# Altium PCB PCB1.PcbDoc (part 2 of 4)
Units mm, origin at the board's own origin, x right, y up, seen from the top; angles counter-clockwise.
Board outline 27.87 x 27.34 mm, 4 copper layers (Top Layer, Mid-Layer 1, Mid-Layer 2, Bottom Layer); 8 components, 11 nets, 32 pads, 618 vias.
Unrouted connection lines stored in the file: 1.
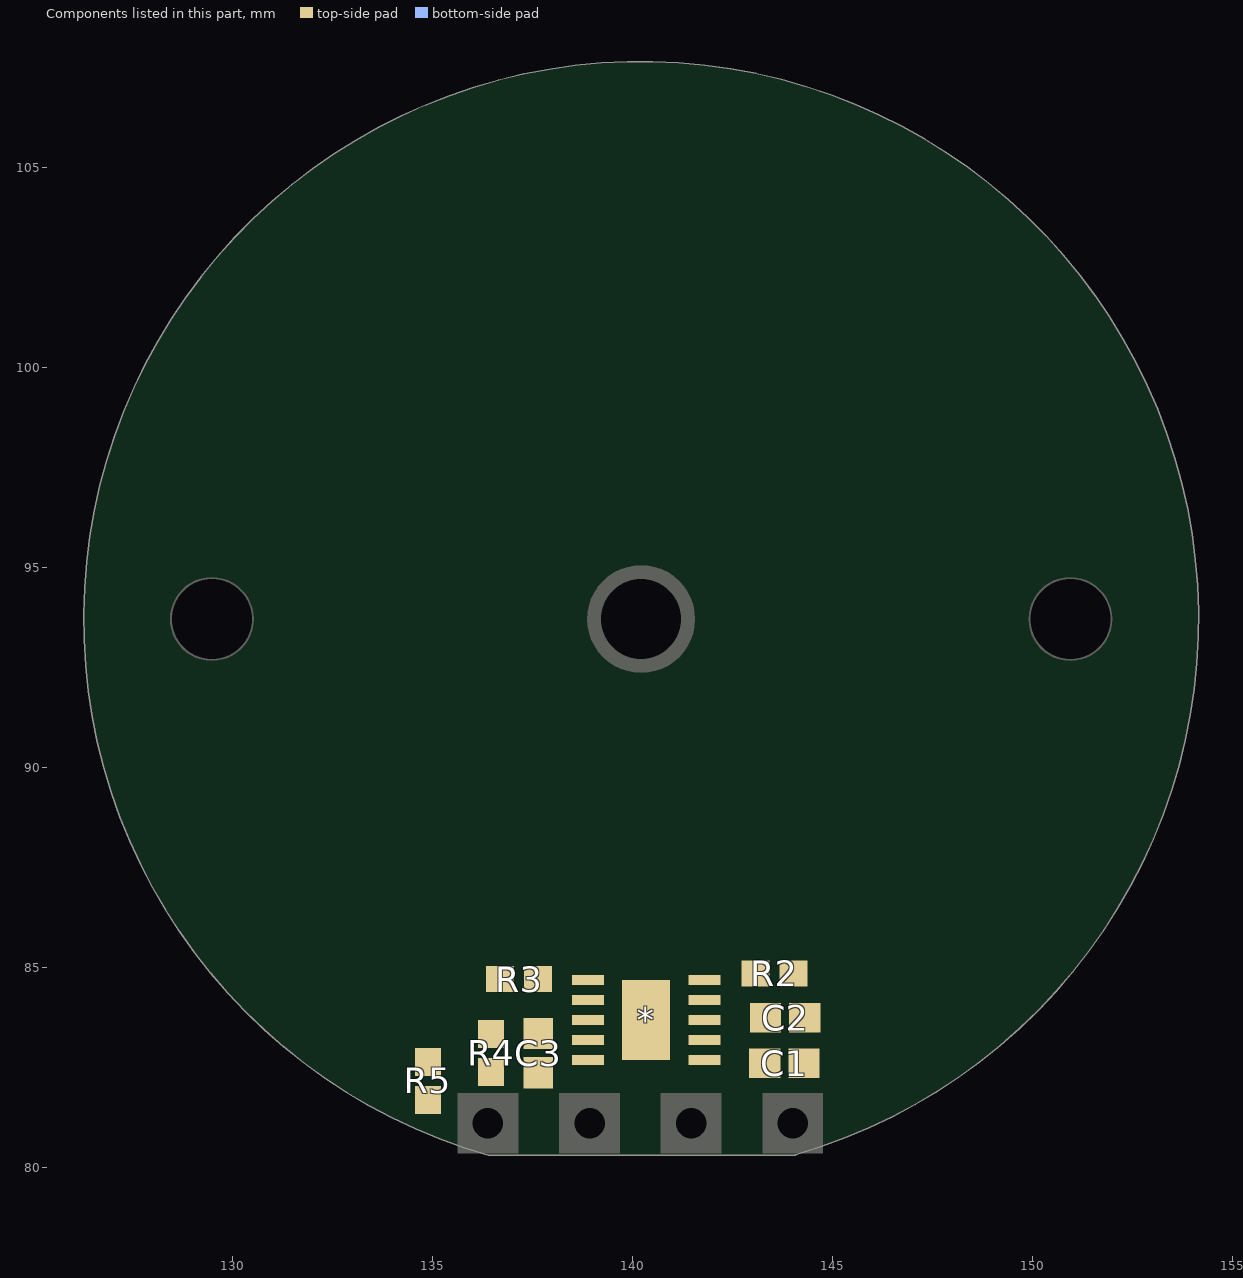
[diagram p4: the components of this part, seen from the top]

## Via types
v1: diameter 0.35, hole 0.3, Top Layer to Bottom Layer, 585 vias
v2: diameter 0.4, hole 0.2, Top Layer to Bottom Layer, tented both sides, 24 vias
v3: diameter 0.6, hole 0.3, Top Layer to Bottom Layer, tented both sides, 9 vias

## Nets (pads, with @x,y where several pads share a name; then routed paths per layer and width w, separated by ;. In a path a pad name is that pad's centre, name@x,y a point inside that pad or via, vN(x,y) a via of type N, cw(c..) or ccw(c..) an arc to the next point about the centre after c; other vN are vias at no path point) (continued)
copper on no net: | length 2486
  Top Layer w0.1: 135.233,91.614 cw(c135.369,91.668) 135.369,91.814 136.645,91.814 cw(c136.645,91.741) 136.709,91.777 ; 135.238,91.601 v2(135.769,91.18) ; 135.733,97.079 134.882,96.012 ccw(c135.369,95.76) 135.412,95.214 136.645,95.214 ccw(c136.645,95.687) 137.05,95.442 ; 135.733,97.079 cw(c136.017,96.882) 136.316,97.055 136.954,95.949 cw(c136.718,95.813) 136.959,95.685 ; v2(136.311,95.964) 136.439,96.442 136.143,96.955 ccw(c136.017,96.882) 135.902,96.972 135.894,96.961 135.056,95.907 ccw(c135.369,95.76) 135.369,95.414 136.645,95.414 ccw(c136.645,95.687) 136.877,95.543 ; 136.712,91.77 ccw(c136.645,91.741) 136.709,91.776 ; 136.776,91.659 cw(c136.718,91.615) 136.781,91.652 ; 136.89,91.861 ccw(c136.645,91.741) 136.877,91.885 ; 136.89,95.567 cw(c136.645,95.687) 136.877,95.543 ; 136.944,91.768 cw(c136.718,91.615) 136.959,91.744 ; 136.944,95.661 ccw(c136.718,95.813) 136.959,95.685 ; 137.067,91.954 ccw(c136.645,91.741) 137.05,91.986 ; 137.067,95.474 cw(c136.645,95.687) 137.05,95.442 ; 137.114,91.874 cw(c136.718,91.615) 137.132,91.843 ; 137.114,95.554 ccw(c136.718,95.813) 137.132,95.585 ; 137.244,92.049 ccw(c136.645,91.741) 137.224,92.085 ; 137.244,95.379 cw(c136.645,95.687) 137.224,95.343 ; 137.284,91.98 cw(c136.718,91.615) 137.305,91.944 ; 137.284,95.449 ccw(c136.718,95.813) 137.305,95.484 ; 137.398,92.184 ccw(c140.208,93.714) 137.437,92.114 ccw(c140.208,93.714) 137.478,92.045 ; 137.398,95.244 cw(c140.208,93.714) 137.437,95.314 cw(c140.208,93.714) 137.478,95.383 ; 137.42,92.144 ccw(c136.645,91.741) 136.645,92.614 135.362,92.614 ccw(c135.369,91.668) 134.523,91.245 135.394,90.135 ccw(c136.017,90.546) 136.663,90.173 137.301,91.279 ccw(c136.718,91.615) 137.305,91.944 ; 137.42,95.284 cw(c136.645,95.687) 136.645,94.814 135.362,94.814 cw(c135.369,95.76) 134.523,96.183 135.394,97.293 cw(c136.017,96.882) 136.663,97.255 137.301,96.149 cw(c136.718,95.813) 137.305,95.484 ; 137.454,92.084 cw(c136.718,91.615) 137.474,91.179 136.832,90.067 cw(c136.017,90.546) 135.227,90.025 134.344,91.155 cw(c135.369,91.668) 135.369,92.814 136.645,92.814 cw(c136.645,91.741) 137.572,92.282 ; 137.454,95.344 ccw(c136.718,95.813) 137.474,96.249 136.832,97.361 ccw(c136.017,96.882) 135.227,97.403 134.344,96.273 ccw(c135.369,95.76) 135.369,94.614 136.645,94.614 ccw(c136.645,95.687) 137.572,95.146 ; 137.488,87.945 cw(c139.56,88.5) 137.702,89.573 138.122,90.301 138.359,90.711 ccw(c136.718,91.615) 138.303,92.614 ; 137.492,87.929 137.549,87.693 cw(c136.483,87.262) 137.633,87.231 ; 138.343,92.547 cw(c140.208,93.714) 138.303,92.614 ; 138.762,94.549 138.303,94.814 cw(c136.645,95.687) 136.683,93.814 135.369,93.814 cw(c135.369,95.76) 133.58,96.525 134.618,97.927 cw(c136.017,96.882) 137.529,97.755 138.188,96.612 cw(c136.718,95.813) 138.13,94.914 cw(c136.645,95.687) 136.688,94.014 135.369,94.014 cw(c135.369,95.76) 133.765,96.449 134.765,97.789 cw(c136.017,96.882) 137.355,97.655 138.017,96.508 cw(c136.718,95.813) 138.004,95.094 ; 139.54,88.356 cw(c139.56,88.5) 139.434,88.573 140.072,89.679 cw(c140.135,89.642) 140.136,89.715 ; 139.546,88.355 139.584,88.355 v2(140.183,88.603) ; 140.128,90.515 ccw(c140.208,93.714) 140.208,90.514 ccw(c140.208,93.714) 140.288,90.515 ; 140.128,96.913 cw(c140.208,93.714) 140.208,96.914 cw(c140.208,93.714) 140.288,96.913 ; 140.144,89.715 ccw(c140.135,89.642) 140.137,89.715 140.208,89.714 140.279,89.715 ccw(c140.281,89.642) 140.272,89.715 ; 140.154,89.914 ccw(c140.135,89.642) 140.126,89.915 ; 140.154,97.514 cw(c140.135,97.786) 140.126,97.513 ; 140.162,90.114 ccw(c140.135,89.642) 140.126,90.115 ; 140.162,97.314 cw(c140.135,97.786) 140.126,97.313 ; 140.168,90.314 ccw(c140.135,89.642) 140.126,90.315 ; 140.168,97.114 cw(c140.135,97.786) 140.126,97.113 ; 140.174,90.514 ccw(c140.135,89.642) 139.379,90.079 138.738,88.967 ccw(c139.56,88.5) 139.504,87.556 140.9,87.756 ccw(c140.856,88.5) 141.502,88.873 140.864,89.979 ccw(c140.281,89.642) 140.29,90.315 ; 140.174,96.914 cw(c140.135,97.786) 139.379,97.349 138.738,98.461 cw(c139.56,98.928) 139.504,99.872 140.9,99.672 cw(c140.856,98.928) 141.502,98.555 140.864,97.449 cw(c140.281,97.786) 140.29,97.113 ; 140.208,95.384 140.208,95.914 cw(c140.135,97.786) 138.532,96.817 138.295,97.227 137.875,97.955 cw(c139.56,98.928) 139.328,100.86 141.061,100.662 cw(c140.856,98.928) 142.368,98.055 141.708,96.912 cw(c140.281,97.786) 140.208,96.114 cw(c140.135,97.786) 138.708,96.912 138.048,98.055 cw(c139.56,98.928) 139.355,100.662 141.015,100.466 cw(c140.856,98.928) 142.194,98.155 141.533,97.008 cw(c140.281,97.786) 140.301,96.312 ; v2(140.208,98.214) 140.686,98.342 140.982,98.855 ccw(c140.856,98.928) 140.876,99.072 140.863,99.074 139.531,99.273 ccw(c139.56,98.928) 139.261,98.755 139.899,97.649 ccw(c140.135,97.786) 140.126,97.513 ; 140.242,90.514 cw(c140.281,89.642) 141.037,90.079 141.678,88.967 cw(c140.856,88.5) 140.912,87.556 139.493,87.356 cw(c139.56,88.5) 138.568,89.073 139.206,90.179 cw(c140.135,89.642) 140.13,90.715 ; 140.242,96.914 ccw(c140.281,97.786) 141.037,97.349 141.678,98.461 ccw(c140.856,98.928) 140.912,99.872 139.493,100.072 ccw(c139.56,98.928) 138.568,98.355 139.206,97.249 ccw(c140.135,97.786) 140.13,96.713 ; 140.248,90.314 cw(c140.281,89.642) 140.29,90.315 ; 140.248,97.114 ccw(c140.281,97.786) 140.29,97.113 ; 140.254,90.114 cw(c140.281,89.642) 140.29,90.115 ; 140.254,97.314 ccw(c140.281,97.786) 140.29,97.313 ; 140.262,89.914 cw(c140.281,89.642) 140.29,89.915 ; 140.262,97.514 ccw(c140.281,97.786) 140.29,97.513 ; 140.28,89.715 cw(c140.281,89.642) 140.344,89.679 140.982,88.573 cw(c140.856,88.5) 140.876,88.356 140.863,88.354 139.531,88.156 cw(c139.56,88.5) 139.261,88.673 139.899,89.779 cw(c140.135,89.642) 140.126,89.915 ; 140.287,91.515 cw(c140.208,93.714) 140.208,91.514 ; 141.654,94.549 142.113,94.814 cw(c143.698,95.813) 142.057,96.717 142.294,97.127 142.714,97.855 cw(c144.399,96.882) 145.957,98.049 146.651,96.449 cw(c145.047,95.76) 145.047,94.014 143.728,94.014 cw(c143.771,95.687) 142.286,94.914 cw(c143.698,95.813) 142.228,96.612 142.887,97.755 cw(c144.399,96.882) 145.798,97.927 146.458,96.391 cw(c145.047,95.76) 145.047,94.214 143.723,94.214 cw(c143.771,95.687) 142.505,94.933 ; 142.151,92.683 cw(c140.208,93.714) 142.113,92.614 ; 142.788,87.159 cw(c143.933,87.262) 144.019,88.409 144.389,88.4 ccw(c144.399,90.546) 146.131,89.279 ; 142.938,92.045 ccw(c140.208,93.714) 142.979,92.114 ccw(c140.208,93.714) 143.018,92.184 ; 142.938,95.383 cw(c140.208,93.714) 142.979,95.314 cw(c140.208,93.714) 143.018,95.244 ; 142.962,92.084 ccw(c143.698,91.615) 142.942,91.179 143.584,90.067 ccw(c144.399,90.546) 145.189,90.025 145.714,91.335 ccw(c145.047,91.668) 145.047,92.414 143.771,92.414 ccw(c143.771,91.741) 143.192,92.085 ; 142.962,95.344 cw(c143.698,95.813) 142.942,96.249 143.584,97.361 cw(c144.399,96.882) 145.189,97.403 145.714,96.094 cw(c145.047,95.76) 145.047,95.014 143.771,95.014 cw(c143.771,95.687) 143.192,95.343 ; 142.996,92.144 cw(c143.771,91.741) 143.771,92.614 145.054,92.614 cw(c145.047,91.668) 145.893,91.245 145.356,89.916 cw(c144.399,90.546) 143.407,89.973 142.769,91.079 cw(c143.698,91.615) 142.766,92.147 ; 142.996,95.284 ccw(c143.771,95.687) 143.771,94.814 145.054,94.814 ccw(c145.047,95.76) 145.893,96.183 145.356,97.512 ccw(c144.399,96.882) 143.407,97.455 142.769,96.349 ccw(c143.698,95.813) 142.766,95.281 ; 143.132,91.98 ccw(c143.698,91.615) 143.111,91.944 ; 143.132,95.449 cw(c143.698,95.813) 143.111,95.484 ; 143.172,92.049 cw(c143.771,91.741) 143.192,92.085 ; 143.172,95.379 ccw(c143.771,95.687) 143.192,95.343 ; 143.302,91.874 ccw(c143.698,91.615) 143.284,91.843 ; 143.302,95.554 cw(c143.698,95.813) 143.284,95.585 ; 143.349,91.954 cw(c143.771,91.741) 143.366,91.986 ; 143.349,95.474 ccw(c143.771,95.687) 143.366,95.442 ; 143.472,91.768 ccw(c143.698,91.615) 143.457,91.744 ; 143.472,95.661 cw(c143.698,95.813) 143.457,95.685 ; 143.526,91.861 cw(c143.771,91.741) 143.539,91.885 ; 143.526,95.567 ccw(c143.771,95.687) 143.539,95.543 ; 143.64,91.659 ccw(c143.698,91.615) 143.635,91.652 ; 143.704,91.77 cw(c143.771,91.741) 143.707,91.776 ; v2(144.105,95.964) 144.455,95.614 145.047,95.614 ccw(c145.047,95.76) 145.183,95.814 145.178,95.827 144.683,97.079 ccw(c144.399,96.882) 144.1,97.055 143.462,95.949 ccw(c143.698,95.813) 143.457,95.685 ; v2(144.622,91.137) 144.514,90.456 cw(c144.399,90.546) 144.273,90.473 143.635,91.579 cw(c143.698,91.615) 143.635,91.652 ; 146.122,89.257 146.131,89.279 ; 146.152,89.309 cw(c144.399,90.546) 146.131,89.279 ; 136.709,91.776 136.744,91.714 136.781,91.652 ; 136.781,91.652 cw(c136.718,91.615) 136.781,91.579 136.143,90.473 cw(c136.017,90.546) 135.902,90.456 135.894,90.467 135.056,91.521 cw(c135.369,91.668) 135.369,92.014 136.645,92.014 cw(c136.645,91.741) 136.877,91.885 ; 136.877,91.885 ccw(c140.208,93.714) 136.917,91.814 ccw(c140.208,93.714) 136.959,91.744 ; 136.877,95.543 cw(c140.208,93.714) 136.917,95.614 cw(c140.208,93.714) 136.959,95.685 ; 136.959,91.744 cw(c136.718,91.615) 136.954,91.479 136.316,90.373 cw(c136.017,90.546) 135.733,90.349 134.882,91.416 cw(c135.369,91.668) 135.412,92.214 136.645,92.214 cw(c136.645,91.741) 137.05,91.986 ; 137.05,91.986 ccw(c140.208,93.714) 137.09,91.914 ccw(c140.208,93.714) 137.132,91.843 ; 137.05,95.442 cw(c140.208,93.714) 137.09,95.514 cw(c140.208,93.714) 137.132,95.585 ; 137.132,91.843 cw(c136.718,91.615) 137.128,91.379 136.511,90.311 cw(c136.017,90.546) 135.555,90.251 134.702,91.335 cw(c135.369,91.668) 135.369,92.414 136.645,92.414 cw(c136.645,91.741) 137.224,92.085 ; 137.132,95.585 ccw(c136.718,95.813) 137.128,96.049 136.511,97.117 ccw(c136.017,96.882) 135.555,97.177 134.702,96.094 ccw(c135.369,95.76) 135.369,95.014 136.645,95.014 ccw(c136.645,95.687) 137.224,95.343 ; 137.224,92.085 ccw(c140.208,93.714) 137.264,92.014 ccw(c140.208,93.714) 137.305,91.944 ; 137.224,95.343 cw(c140.208,93.714) 137.264,95.414 cw(c140.208,93.714) 137.305,95.484 ; 137.572,92.282 cw(c136.645,91.741) 137.596,92.239 ; 137.572,92.282 ccw(c140.208,93.714) 137.596,92.239 ; 137.572,95.146 cw(c140.208,93.714) 137.596,95.189 ; 137.572,95.146 ccw(c136.645,95.687) 137.596,95.189 ; 137.596,92.239 ccw(c140.208,93.714) 137.61,92.214 ccw(c140.208,93.714) 137.625,92.189 ; 137.596,95.189 cw(c140.208,93.714) 137.61,95.214 cw(c140.208,93.714) 137.625,95.239 ; 137.625,92.189 cw(c136.718,91.615) 137.65,92.147 ; 137.625,92.189 ccw(c140.208,93.714) 137.65,92.147 ; 137.625,95.239 ccw(c136.718,95.813) 137.65,95.281 ; 137.625,95.239 cw(c140.208,93.714) 137.65,95.281 ; 137.65,92.147 cw(c136.718,91.615) 137.647,91.079 137.009,89.973 cw(c136.017,90.546) 135.06,89.916 134.152,91.093 cw(c135.369,91.668) 135.369,93.014 136.697,93.014 cw(c136.645,91.741) 137.735,92.402 ccw(c140.208,93.714) 137.783,92.314 cw(c136.718,91.615) 137.846,91.023 137.182,89.873 cw(c136.017,90.546) 134.91,89.78 133.958,91.037 cw(c135.369,91.668) 135.369,93.214 136.693,93.214 cw(c136.645,91.741) 137.911,92.495 ccw(c140.208,93.714) 137.956,92.414 ; 137.65,95.281 ccw(c136.718,95.813) 137.647,96.349 137.009,97.455 ccw(c136.017,96.882) 135.06,97.512 134.152,96.335 ccw(c135.369,95.76) 135.369,94.414 136.697,94.414 ccw(c136.645,95.687) 137.735,95.026 cw(c140.208,93.714) 137.783,95.114 ccw(c136.718,95.813) 137.846,96.405 137.182,97.555 ccw(c136.017,96.882) 134.91,97.648 133.958,96.391 ccw(c135.369,95.76) 135.369,94.214 136.693,94.214 ccw(c136.645,95.687) 137.911,94.933 cw(c140.208,93.714) 137.956,95.014 ; 137.956,92.414 cw(c136.718,91.615) 138.004,92.334 ; 137.956,92.414 ccw(c140.208,93.714) 138.004,92.334 ; 137.956,95.014 cw(c140.208,93.714) 138.004,95.094 ; 137.956,95.014 ccw(c136.718,95.813) 138.004,95.094 ; 138.004,92.334 cw(c136.718,91.615) 138.017,90.92 137.355,89.773 cw(c136.017,90.546) 134.765,89.639 133.765,90.979 cw(c135.369,91.668) 135.369,93.414 136.688,93.414 cw(c136.645,91.741) 138.13,92.514 cw(c136.718,91.615) 138.188,90.816 137.529,89.673 cw(c136.017,90.546) 134.618,89.501 133.58,90.903 cw(c135.369,91.668) 135.369,93.614 136.683,93.614 cw(c136.645,91.741) 138.303,92.614 ; 139.328,86.568 cw(c139.56,88.5) 137.875,89.473 138.295,90.201 138.532,90.611 cw(c140.135,89.642) 140.208,91.514 ; 139.328,86.568 141.061,86.767 ; 139.328,86.568 141.061,86.767 ; 139.355,86.767 cw(c139.56,88.5) 138.048,89.373 138.708,90.516 cw(c140.135,89.642) 140.208,91.314 cw(c140.281,89.642) 141.708,90.516 142.368,89.373 cw(c140.856,88.5) 141.062,86.767 ; 139.355,86.767 141.015,86.963 ; 139.355,86.767 141.015,86.963 ; 140.126,89.915 ccw(c140.208,93.714) 140.208,89.914 ccw(c140.208,93.714) 140.29,89.915 ; 140.126,90.115 ccw(c140.135,89.642) 139.726,89.879 139.109,88.811 ccw(c139.56,88.5) 139.535,87.953 140.885,88.156 ccw(c140.856,88.5) 141.155,88.673 140.517,89.779 ccw(c140.281,89.642) 140.29,89.915 ; 140.126,90.115 ccw(c140.208,93.714) 140.208,90.114 ccw(c140.208,93.714) 140.29,90.115 ; 140.126,97.313 cw(c140.208,93.714) 140.208,97.314 cw(c140.208,93.714) 140.29,97.313 ; 140.126,97.313 cw(c140.135,97.786) 139.726,97.549 139.109,98.617 cw(c139.56,98.928) 139.535,99.475 140.885,99.273 cw(c140.856,98.928) 141.155,98.755 140.517,97.649 cw(c140.281,97.786) 140.29,97.513 ; 140.126,97.513 cw(c140.208,93.714) 140.208,97.514 cw(c140.208,93.714) 140.29,97.513 ; 140.126,90.315 ccw(c140.135,89.642) 139.552,89.979 138.914,88.873 ccw(c139.56,88.5) 139.516,87.756 140.881,87.953 ccw(c140.856,88.5) 141.307,88.811 140.69,89.879 ccw(c140.281,89.642) 140.29,90.115 ; 140.126,90.315 ccw(c140.208,93.714) 140.208,90.314 ccw(c140.208,93.714) 140.29,90.315 ; 140.126,97.113 cw(c140.135,97.786) 139.552,97.449 138.914,98.555 cw(c139.56,98.928) 139.516,99.672 140.881,99.475 cw(c140.856,98.928) 141.307,98.617 140.69,97.549 cw(c140.281,97.786) 140.29,97.313 ; 140.126,97.113 cw(c140.208,93.714) 140.208,97.114 cw(c140.208,93.714) 140.29,97.113 ; 140.13,90.715 ccw(c140.208,93.714) 140.179,90.714 ; 140.13,90.715 cw(c140.135,89.642) 140.179,90.714 ; 140.13,96.713 cw(c140.208,93.714) 140.179,96.714 ; 140.13,96.713 ccw(c140.135,97.786) 140.179,96.714 ; 140.179,90.714 ccw(c140.208,93.714) 140.208,90.714 ccw(c140.208,93.714) 140.237,90.714 ; 140.179,96.714 cw(c140.208,93.714) 140.208,96.714 cw(c140.208,93.714) 140.237,96.714 ; 140.208,91.114 cw(c140.208,93.714) 140.115,91.116 ccw(c140.135,89.642) 138.883,90.42 138.222,89.273 ccw(c139.56,88.5) 139.401,86.963 140.966,87.159 ccw(c140.856,88.5) 142.021,89.173 141.357,90.323 ccw(c140.281,89.642) 140.208,90.914 cw(c140.208,93.714) 140.108,90.916 ccw(c140.135,89.642) 139.059,90.323 138.395,89.173 ccw(c139.56,88.5) 139.45,87.159 140.923,87.356 ccw(c140.856,88.5) 141.848,89.073 141.21,90.179 ccw(c140.281,89.642) 140.286,90.715 ; 140.208,91.114 ccw(c140.208,93.714) 140.301,91.116 ; 140.208,91.114 cw(c140.281,89.642) 140.301,91.116 ; 140.208,91.514 cw(c140.281,89.642) 141.884,90.611 142.121,90.201 142.541,89.473 cw(c140.856,88.5) 141.088,86.568 ; 140.208,96.314 ccw(c140.208,93.714) 140.115,96.312 cw(c140.135,97.786) 138.883,97.008 138.222,98.155 cw(c139.56,98.928) 139.401,100.466 140.966,100.269 cw(c140.856,98.928) 142.021,98.255 141.357,97.105 cw(c140.281,97.786) 140.208,96.514 ccw(c140.208,93.714) 140.108,96.512 cw(c140.135,97.786) 139.059,97.105 138.395,98.255 cw(c139.56,98.928) 139.45,100.269 140.923,100.072 cw(c140.856,98.928) 141.848,98.355 141.21,97.249 cw(c140.281,97.786) 140.286,96.713 ; 140.208,96.314 ccw(c140.281,97.786) 140.301,96.312 ; 140.208,96.314 cw(c140.208,93.714) 140.301,96.312 ; 140.237,90.714 ccw(c140.208,93.714) 140.286,90.715 ; 140.237,90.714 cw(c140.281,89.642) 140.286,90.715 ; 140.237,96.714 ccw(c140.281,97.786) 140.286,96.713 ; 140.237,96.714 cw(c140.208,93.714) 140.286,96.713 ; 140.301,91.116 cw(c140.281,89.642) 141.533,90.42 142.194,89.273 cw(c140.856,88.5) 141.015,86.963 ; 140.435,86.494 ccw(c140.435,86.267) 140.208,86.267 cw(c140.435,86.267) 140.435,86.494 ; 140.435,86.494 141.088,86.568 ; 140.435,86.494 141.088,86.568 ; 142.113,92.614 ccw(c143.698,91.615) 142.057,90.711 142.294,90.301 142.714,89.573 ccw(c144.399,90.546) 145.957,89.379 146.651,90.979 ccw(c145.047,91.668) 145.047,93.414 143.728,93.414 ccw(c143.771,91.741) 142.286,92.514 ccw(c143.698,91.615) 142.228,90.816 142.887,89.673 ccw(c144.399,90.546) 145.798,89.501 146.458,91.037 ccw(c145.047,91.668) 145.047,93.214 143.723,93.214 ccw(c143.771,91.741) 142.505,92.495 ; 142.113,92.614 cw(c143.771,91.741) 143.728,93.614 ; 142.46,92.414 cw(c140.208,93.714) 142.412,92.334 ccw(c143.698,91.615) 142.399,90.92 143.061,89.773 ccw(c144.399,90.546) 145.651,89.639 146.264,91.093 ccw(c145.047,91.668) 145.047,93.014 143.719,93.014 ccw(c143.771,91.741) 142.633,92.314 cw(c140.208,93.714) 142.581,92.228 ccw(c143.698,91.615) 142.57,91.023 143.234,89.873 ccw(c144.399,90.546) 145.506,89.78 146.072,91.155 ccw(c145.047,91.668) 145.047,92.814 143.771,92.814 ccw(c143.771,91.741) 142.844,92.282 ; 142.46,92.414 ccw(c140.208,93.714) 142.505,92.495 ; 142.46,92.414 cw(c143.771,91.741) 142.505,92.495 ; 142.46,95.014 ccw(c140.208,93.714) 142.412,95.094 cw(c143.698,95.813) 142.399,96.508 143.061,97.655 cw(c144.399,96.882) 145.651,97.789 146.264,96.335 cw(c145.047,95.76) 145.047,94.414 143.719,94.414 cw(c143.771,95.687) 142.633,95.114 ccw(c140.208,93.714) 142.581,95.2 cw(c143.698,95.813) 142.57,96.405 143.234,97.555 cw(c144.399,96.882) 145.506,97.648 146.072,96.273 cw(c145.047,95.76) 145.047,94.614 143.771,94.614 cw(c143.771,95.687) 142.844,95.146 ; 142.46,95.014 ccw(c143.771,95.687) 142.505,94.933 ; 142.46,95.014 cw(c140.208,93.714) 142.505,94.933 ; 142.766,92.147 ccw(c140.208,93.714) 142.791,92.189 ; 142.766,92.147 cw(c143.698,91.615) 142.791,92.189 ; 142.766,95.281 cw(c140.208,93.714) 142.791,95.239 ; 142.766,95.281 ccw(c143.698,95.813) 142.791,95.239 ; 142.791,92.189 ccw(c140.208,93.714) 142.806,92.214 ccw(c140.208,93.714) 142.82,92.239 ; 142.791,95.239 cw(c140.208,93.714) 142.806,95.214 cw(c140.208,93.714) 142.82,95.189 ; 142.82,92.239 cw(c143.771,91.741) 142.844,92.282 ; 142.82,92.239 ccw(c140.208,93.714) 142.844,92.282 ; 142.82,95.189 cw(c140.208,93.714) 142.844,95.146 ; 142.82,95.189 ccw(c143.771,95.687) 142.844,95.146 ; 143.111,91.944 ccw(c143.698,91.615) 143.115,91.279 143.753,90.173 ccw(c144.399,90.546) 145.022,90.135 145.534,91.416 ccw(c145.047,91.668) 145.004,92.214 143.771,92.214 ccw(c143.771,91.741) 143.366,91.986 ; 143.111,91.944 ccw(c140.208,93.714) 143.152,92.014 ccw(c140.208,93.714) 143.192,92.085 ; 143.111,95.484 cw(c143.698,95.813) 143.115,96.149 143.753,97.255 cw(c144.399,96.882) 145.022,97.293 145.534,96.012 cw(c145.047,95.76) 145.004,95.214 143.771,95.214 cw(c143.771,95.687) 143.366,95.442 ; 143.111,95.484 cw(c140.208,93.714) 143.152,95.414 cw(c140.208,93.714) 143.192,95.343 ; 143.284,91.843 ccw(c143.698,91.615) 143.288,91.379 143.905,90.311 ccw(c144.399,90.546) 144.861,90.251 145.36,91.521 ccw(c145.047,91.668) 145.047,92.014 143.771,92.014 ccw(c143.771,91.741) 143.539,91.885 ; 143.284,91.843 ccw(c140.208,93.714) 143.326,91.914 ccw(c140.208,93.714) 143.366,91.986 ; 143.284,95.585 cw(c143.698,95.813) 143.288,96.049 143.905,97.117 cw(c144.399,96.882) 144.861,97.177 145.36,95.907 cw(c145.047,95.76) 145.047,95.414 143.771,95.414 cw(c143.771,95.687) 143.539,95.543 ; 143.284,95.585 cw(c140.208,93.714) 143.326,95.514 cw(c140.208,93.714) 143.366,95.442 ; 143.457,91.744 ccw(c143.698,91.615) 143.462,91.479 144.1,90.373 ccw(c144.399,90.546) 144.683,90.349 145.178,91.601 145.183,91.614 ccw(c145.047,91.668) 145.047,91.814 143.771,91.814 ccw(c143.771,91.741) 143.707,91.777 ; 143.457,91.744 ccw(c140.208,93.714) 143.499,91.814 ccw(c140.208,93.714) 143.539,91.885 ; 143.457,95.685 cw(c140.208,93.714) 143.499,95.614 cw(c140.208,93.714) 143.539,95.543 ; 143.635,91.652 143.672,91.714 143.707,91.776 ; 143.728,93.614 cw(c143.771,91.741) 143.733,93.614 ; 143.728,93.614 143.733,93.614 ; 143.733,93.614 145.047,93.614 cw(c145.047,91.668) 146.836,90.903 146.131,89.279 ; 141.258,93.714 ccw(c140.208,93.714) 141.258,93.714
  Top Layer w0.254: 135.793,81.694 136.379,81.109 ; 136.525,83.82 135.967,84.378 135.967,85.548 136.525,86.106 137.16,86.106 137.633,86.579 137.633,87.231 ; 137.644,82.319 137.709,82.319 ; 138.875,82.693 139.049,82.693 139.065,82.677 ; 138.875,83.693 140.335,83.693 140.208,83.566 ; 138.875,84.693 138.875,85.027 139.065,85.217 139.954,85.217 140.208,85.471 140.208,86.267 ; 141.459,81.109 141.706,81.109 ; 142.788,87.159 142.788,85.133 143.065,84.856
  Top Layer w0.3: 138.805,94.524 cw(c140.208,93.714) 141.621,94.507
  Top Layer w0.4: 140.335,83.693 140.335,82.296 141.49,81.141
  Mid-Layer 1 w0.1: 134.882,91.416 135.394,90.135 ccw(c136.017,90.546) 136.663,90.173 137.301,91.279 ccw(c136.718,91.615) 137.305,91.944 ; 134.882,91.417 cw(c135.369,91.668) 135.412,92.214 136.645,92.214 cw(c136.645,91.741) 137.05,91.986 ; 135.733,97.079 134.882,96.012 ccw(c135.369,95.76) 135.412,95.214 136.645,95.214 ccw(c136.645,95.687) 137.05,95.442 ; 135.733,97.079 cw(c136.017,96.882) 136.316,97.055 136.954,95.949 cw(c136.718,95.813) 136.959,95.685 ; v2(135.794,96.291) 135.233,95.814 ccw(c135.369,95.76) 135.369,95.614 136.645,95.614 ccw(c136.645,95.687) 136.709,95.651 ; v2(136.311,91.464) 135.961,91.814 135.369,91.814 ccw(c135.369,91.668) 135.233,91.614 135.238,91.601 135.733,90.349 ccw(c136.017,90.546) 136.316,90.373 136.954,91.479 ccw(c136.718,91.615) 136.959,91.744 ; 136.712,95.658 cw(c136.645,95.687) 136.709,95.651 ; 136.776,95.769 ccw(c136.718,95.813) 136.781,95.776 ; 136.89,91.861 ccw(c136.645,91.741) 136.877,91.885 ; 136.89,95.567 cw(c136.645,95.687) 136.877,95.543 ; 136.944,91.768 cw(c136.718,91.615) 136.959,91.744 ; 136.944,95.661 ccw(c136.718,95.813) 136.959,95.685 ; v2(137.022,88.393) 137.555,88.92 137.976,89.647 ; 137.067,91.954 ccw(c136.645,91.741) 137.05,91.986 ; 137.067,95.474 cw(c136.645,95.687) 137.05,95.442 ; 137.114,91.874 cw(c136.718,91.615) 137.132,91.843 ; 137.114,95.554 ccw(c136.718,95.813) 137.132,95.585 ; v2(137.131,98.954) 137.282,98.582 137.702,97.855 138.122,97.127 138.359,96.717 cw(c136.718,95.813) 138.303,94.814 ; 137.244,92.049 ccw(c136.645,91.741) 137.224,92.085 ; 137.244,95.379 cw(c136.645,95.687) 137.224,95.343 ; 137.284,91.98 cw(c136.718,91.615) 137.305,91.944 ; 137.284,95.449 ccw(c136.718,95.813) 137.305,95.484 ; 137.398,92.184 ccw(c140.208,93.714) 137.437,92.114 ccw(c140.208,93.714) 137.478,92.045 ; 137.398,95.244 cw(c140.208,93.714) 137.437,95.314 cw(c140.208,93.714) 137.478,95.383 ; 137.42,92.144 ccw(c136.645,91.741) 136.645,92.614 135.362,92.614 ccw(c135.369,91.668) 134.523,91.245 135.06,89.916 ccw(c136.017,90.546) 137.009,89.973 137.647,91.079 ccw(c136.718,91.615) 137.65,92.147 ; 137.42,95.284 cw(c136.645,95.687) 136.645,94.814 135.362,94.814 cw(c135.369,95.76) 134.523,96.183 135.394,97.293 cw(c136.017,96.882) 136.663,97.255 137.301,96.149 cw(c136.718,95.813) 137.305,95.484 ; 137.454,92.084 cw(c136.718,91.615) 137.474,91.179 136.832,90.067 cw(c136.017,90.546) 135.227,90.025 134.702,91.335 cw(c135.369,91.668) 135.369,92.414 136.645,92.414 cw(c136.645,91.741) 137.224,92.085 ; 137.454,95.344 ccw(c136.718,95.813) 137.474,96.249 136.832,97.361 ccw(c136.017,96.882) 135.227,97.403 134.344,96.273 ccw(c135.369,95.76) 135.369,94.614 136.645,94.614 ccw(c136.645,95.687) 137.572,95.146 ; 137.875,89.473 138.295,90.201 138.532,90.611 cw(c140.135,89.642) 140.208,91.514 ; 138.343,94.881 ccw(c140.208,93.714) 138.303,94.814 ; 138.762,92.879 138.303,92.614 cw(c136.718,91.615) 138.359,90.711 138.122,90.301 137.702,89.573 cw(c136.017,90.546) 134.459,89.379 133.765,90.979 cw(c135.369,91.668) 135.369,93.414 136.688,93.414 cw(c136.645,91.741) 138.13,92.514 cw(c136.718,91.615) 138.188,90.816 137.529,89.673 cw(c136.017,90.546) 134.618,89.501 133.958,91.037 cw(c135.369,91.668) 135.369,93.214 136.693,93.214 cw(c136.645,91.741) 137.911,92.495 ; 139.54,99.072 ccw(c139.56,98.928) 139.434,98.855 140.072,97.749 ccw(c140.135,97.786) 140.136,97.713 ; 139.546,99.073 v2(140.233,98.825) ; 140.128,90.515 ccw(c140.208,93.714) 140.208,90.514 ccw(c140.208,93.714) 140.288,90.515 ; 140.128,96.913 cw(c140.208,93.714) 140.208,96.914 cw(c140.208,93.714) 140.288,96.913 ; 140.129,91.515 ccw(c140.208,93.714) 140.208,91.514 ; 140.136,89.715 ccw(c140.135,89.642) 140.072,89.679 139.434,88.573 ccw(c139.56,88.5) 139.54,88.356 139.553,88.354 140.885,88.156 ccw(c140.856,88.5) 141.155,88.673 140.517,89.779 ccw(c140.281,89.642) 140.29,89.915 ; 140.144,89.715 ccw(c140.135,89.642) 140.137,89.715 140.208,89.714 140.279,89.715 ccw(c140.281,89.642) 140.272,89.715 ; 140.144,97.714 cw(c140.135,97.786) 140.137,97.713 140.208,97.714 140.279,97.713 cw(c140.281,97.786) 140.272,97.714 ; 140.154,89.914 ccw(c140.135,89.642) 140.126,89.915 ; 140.154,97.514 cw(c140.135,97.786) 140.126,97.513 ; 140.162,90.114 ccw(c140.135,89.642) 140.126,90.115 ; 140.162,97.314 cw(c140.135,97.786) 140.126,97.313 ; 140.168,90.314 ccw(c140.135,89.642) 140.126,90.315 ; 140.168,97.114 cw(c140.135,97.786) 140.126,97.113 ; 140.174,90.514 ccw(c140.135,89.642) 139.379,90.079 138.738,88.967 ccw(c139.56,88.5) 139.504,87.556 140.923,87.356 ccw(c140.856,88.5) 141.848,89.073 141.21,90.179 ccw(c140.281,89.642) 140.286,90.715 ; 140.174,96.914 cw(c140.135,97.786) 139.379,97.349 138.738,98.461 cw(c139.56,98.928) 139.504,99.872 140.9,99.672 cw(c140.856,98.928) 141.502,98.555 140.864,97.449 cw(c140.281,97.786) 140.29,97.113 ; v2(140.183,88.603) 140.87,88.355 ; 140.242,90.514 cw(c140.281,89.642) 141.037,90.079 141.678,88.967 cw(c140.856,88.5) 140.912,87.556 139.516,87.756 cw(c139.56,88.5) 138.914,88.873 139.552,89.979 cw(c140.135,89.642) 140.126,90.315 ; 140.242,96.914 ccw(c140.281,97.786) 141.037,97.349 141.678,98.461 ccw(c140.856,98.928) 140.912,99.872 139.493,100.072 ccw(c139.56,98.928) 138.568,98.355 139.206,97.249 ccw(c140.135,97.786) 140.13,96.713 ; 140.248,90.314 cw(c140.281,89.642) 140.29,90.315 ; 140.248,97.114 ccw(c140.281,97.786) 140.29,97.113 ; 140.254,90.114 cw(c140.281,89.642) 140.29,90.115 ; 140.254,97.314 ccw(c140.281,97.786) 140.29,97.313 ; 140.262,89.914 cw(c140.281,89.642) 140.29,89.915 ; 140.262,97.514 ccw(c140.281,97.786) 140.29,97.513 ; 140.28,89.715 cw(c140.281,89.642) 140.344,89.679 140.982,88.573 cw(c140.856,88.5) 140.876,88.356 ; 140.28,97.713 ccw(c140.281,97.786) 140.344,97.749 140.982,98.855 ccw(c140.856,98.928) 140.876,99.072 140.863,99.074 139.531,99.273 ccw(c139.56,98.928) 139.261,98.755 139.899,97.649 ccw(c140.135,97.786) 140.126,97.513 ; 140.287,95.913 ccw(c140.208,93.714) 140.208,95.914 ; 141.654,94.549 142.113,94.814 ccw(c143.771,95.687) 143.733,93.814 145.047,93.814 ccw(c145.047,95.76) 146.836,96.525 145.798,97.927 ccw(c144.399,96.882) 142.887,97.755 142.228,96.612 ccw(c143.698,95.813) 142.286,94.914 ccw(c143.771,95.687) 143.728,94.014 145.047,94.014 ccw(c145.047,95.76) 146.651,96.449 145.651,97.789 ccw(c144.399,96.882) 143.061,97.655 142.399,96.508 ccw(c143.698,95.813) 142.412,95.094 ; 142.073,92.547 ccw(c140.208,93.714) 142.113,92.614 ; 142.938,92.045 ccw(c140.208,93.714) 142.979,92.114 ccw(c140.208,93.714) 143.018,92.184 ; 142.938,95.383 cw(c140.208,93.714) 142.979,95.314 cw(c140.208,93.714) 143.018,95.244 ; 142.962,92.084 ccw(c143.698,91.615) 142.942,91.179 143.584,90.067 ccw(c144.399,90.546) 145.189,90.025 146.072,91.155 ccw(c145.047,91.668) 145.047,92.814 143.771,92.814 ccw(c143.771,91.741) 142.844,92.282 ; 142.962,95.344 cw(c143.698,95.813) 142.942,96.249 143.584,97.361 cw(c144.399,96.882) 145.189,97.403 146.072,96.273 cw(c145.047,95.76) 145.047,94.614 143.771,94.614 cw(c143.771,95.687) 142.844,95.146 ; 142.996,92.144 cw(c143.771,91.741) 143.771,92.614 145.054,92.614 cw(c145.047,91.668) 145.893,91.245 145.022,90.135 cw(c144.399,90.546) 143.753,90.173 143.115,91.279 cw(c143.698,91.615) 143.111,91.944 ; 142.996,95.284 ccw(c143.771,95.687) 143.771,94.814 145.054,94.814 ccw(c145.047,95.76) 145.893,96.183 145.022,97.293 ccw(c144.399,96.882) 143.753,97.255 143.115,96.149 ccw(c143.698,95.813) 143.111,95.484 ; 143.132,91.98 ccw(c143.698,91.615) 143.111,91.944 ; 143.132,95.449 cw(c143.698,95.813) 143.111,95.484 ; v2(143.169,88.569) 143.134,88.846 142.714,89.573 142.294,90.301 142.057,90.711 cw(c143.698,91.615) 142.113,92.614 ; 143.172,92.049 cw(c143.771,91.741) 143.192,92.085 ; 143.172,95.379 ccw(c143.771,95.687) 143.192,95.343 ; v2(143.207,98.999) 142.961,98.682 142.541,97.955 142.121,97.227 141.884,96.817 cw(c140.281,97.786) 140.208,95.914 ; 143.302,91.874 ccw(c143.698,91.615) 143.284,91.843 ; 143.302,95.554 cw(c143.698,95.813) 143.284,95.585 ; 143.349,91.954 cw(c143.771,91.741) 143.366,91.986 ; 143.349,95.474 ccw(c143.771,95.687) 143.366,95.442 ; 143.472,91.768 ccw(c143.698,91.615) 143.457,91.744 ; 143.472,95.661 cw(c143.698,95.813) 143.457,95.685 ; 143.526,91.861 cw(c143.771,91.741) 143.539,91.885 ; 143.526,95.567 ccw(c143.771,95.687) 143.539,95.543 ; 143.64,91.659 ccw(c143.698,91.615) 143.635,91.652 ; 143.64,95.769 cw(c143.698,95.813) 143.635,95.776 ; 143.704,91.77 cw(c143.771,91.741) 143.707,91.777 ; 143.704,95.658 ccw(c143.771,95.687) 143.707,95.652 ; v2(144.622,91.137) 145.183,91.614 ccw(c145.047,91.668) 145.047,91.814 143.771,91.814 ccw(c143.771,91.741) 143.707,91.777 ; v2(144.647,96.248) 145.178,95.827 ; 145.183,95.814 cw(c145.047,95.76) 145.047,95.614 143.771,95.614 cw(c143.771,95.687) 143.707,95.651 ; 136.709,95.651 136.744,95.714 136.781,95.776 ; 136.781,95.776 ccw(c136.718,95.813) 136.781,95.849 136.143,96.955 ccw(c136.017,96.882) 135.902,96.972 135.894,96.961 135.056,95.907 ccw(c135.369,95.76) 135.369,95.414 136.645,95.414 ccw(c136.645,95.687) 136.877,95.543 ; 136.877,91.885 ccw(c136.645,91.741) 136.645,92.014 135.369,92.014 ccw(c135.369,91.668) 135.056,91.521 135.555,90.251 ccw(c136.017,90.546) 136.511,90.311 137.128,91.379 ccw(c136.718,91.615) 137.132,91.843 ; 136.877,91.885 ccw(c140.208,93.714) 136.917,91.814 ccw(c140.208,93.714) 136.959,91.744 ; 136.877,95.543 cw(c140.208,93.714) 136.917,95.614 cw(c140.208,93.714) 136.959,95.685 ; 137.05,91.986 ccw(c140.208,93.714) 137.09,91.914 ccw(c140.208,93.714) 137.132,91.843 ; 137.05,95.442 cw(c140.208,93.714) 137.09,95.514 cw(c140.208,93.714) 137.132,95.585 ; 137.132,95.585 ccw(c136.718,95.813) 137.128,96.049 136.511,97.117 ccw(c136.017,96.882) 135.555,97.177 134.702,96.094 ccw(c135.369,95.76) 135.369,95.014 136.645,95.014 ccw(c136.645,95.687) 137.224,95.343 ; 137.224,92.085 ccw(c140.208,93.714) 137.264,92.014 ccw(c140.208,93.714) 137.305,91.944 ; 137.224,95.343 cw(c140.208,93.714) 137.264,95.414 cw(c140.208,93.714) 137.305,95.484 ; 137.572,92.282 ccw(c136.645,91.741) 136.645,92.814 135.369,92.814 ccw(c135.369,91.668) 134.344,91.155 134.91,89.78 ccw(c136.017,90.546) 137.182,89.873 137.846,91.023 ccw(c136.718,91.615) 137.835,92.228 cw(c140.208,93.714) 137.783,92.314 ccw(c136.645,91.741) 136.697,93.014 135.369,93.014 ccw(c135.369,91.668) 134.152,91.093 134.765,89.639 ccw(c136.017,90.546) 137.355,89.773 138.017,90.92 ccw(c136.718,91.615) 138.004,92.334 cw(c140.208,93.714) 137.956,92.414 ; 137.572,92.282 cw(c136.645,91.741) 137.596,92.239 ; 137.572,92.282 ccw(c140.208,93.714) 137.596,92.239 ; 137.572,95.146 cw(c140.208,93.714) 137.596,95.189 ; 137.572,95.146 ccw(c136.645,95.687) 137.596,95.189 ; 137.596,92.239 ccw(c140.208,93.714) 137.61,92.214 ccw(c140.208,93.714) 137.625,92.189 ; 137.596,95.189 cw(c140.208,93.714) 137.61,95.214 cw(c140.208,93.714) 137.625,95.239 ; 137.625,92.189 ccw(c140.208,93.714) 137.65,92.147 ; 137.625,92.189 cw(c136.718,91.615) 137.65,92.147 ; 137.625,95.239 ccw(c136.718,95.813) 137.65,95.281 ; 137.625,95.239 cw(c140.208,93.714) 137.65,95.281 ; 137.65,95.281 ccw(c136.718,95.813) 137.647,96.349 137.009,97.455 ccw(c136.017,96.882) 135.06,97.512 134.152,96.335 ccw(c135.369,95.76) 135.369,94.414 136.697,94.414 ccw(c136.645,95.687) 137.735,95.026 cw(c140.208,93.714) 137.783,95.114 ccw(c136.718,95.813) 137.846,96.405 137.182,97.555 ccw(c136.017,96.882) 134.91,97.648 133.958,96.391 ccw(c135.369,95.76) 135.369,94.214 136.693,94.214 ccw(c136.645,95.687) 137.911,94.933 cw(c140.208,93.714) 137.956,95.014 ; 137.911,92.495 ccw(c140.208,93.714) 137.956,92.414 ; 137.911,92.495 cw(c136.645,91.741) 137.956,92.414 ; 137.956,95.014 cw(c140.208,93.714) 138.004,95.094 ; 137.956,95.014 ccw(c136.718,95.813) 138.004,95.094 ; 138.004,95.094 ccw(c136.718,95.813) 138.017,96.508 137.355,97.655 ccw(c136.017,96.882) 134.765,97.789 133.765,96.449 ccw(c135.369,95.76) 135.369,94.014 136.688,94.014 ccw(c136.645,95.687) 138.13,94.914 ccw(c136.718,95.813) 138.188,96.612 137.529,97.755 ccw(c136.017,96.882) 134.618,97.927 133.58,96.525 ccw(c135.369,95.76) 135.369,93.814 136.683,93.814 ccw(c136.645,95.687) 138.303,94.814 ; 139.354,86.767 cw(c139.56,88.5) 138.048,89.373 138.708,90.516 cw(c140.135,89.642) 140.208,91.314 cw(c140.281,89.642) 141.708,90.516 142.368,89.373 cw(c140.856,88.5) 141.061,86.767 ; 139.355,86.767 141.088,86.568 ; 139.355,86.767 141.088,86.568 ; 139.401,86.963 cw(c139.56,88.5) 138.222,89.273 138.883,90.42 cw(c140.135,89.642) 140.115,91.116 ; 139.401,86.963 141.061,86.767 ; 139.401,86.963 141.061,86.767 ; 140.115,91.116 ccw(c140.208,93.714) 140.208,91.114 ; 140.115,91.116 cw(c140.135,89.642) 140.208,91.114 ; 140.126,89.915 ccw(c140.135,89.642) 139.899,89.779 139.261,88.673 ccw(c139.56,88.5) 139.531,88.156 140.881,87.953 ccw(c140.856,88.5) 141.307,88.811 140.69,89.879 ccw(c140.281,89.642) 140.29,90.115 ; 140.126,89.915 ccw(c140.208,93.714) 140.208,89.914 ccw(c140.208,93.714) 140.29,89.915 ; 140.126,90.115 ccw(c140.135,89.642) 139.726,89.879 139.109,88.811 ccw(c139.56,88.5) 139.535,87.953 140.9,87.756 ccw(c140.856,88.5) 141.502,88.873 140.864,89.979 ccw(c140.281,89.642) 140.29,90.315 ; 140.126,90.115 ccw(c140.208,93.714) 140.208,90.114 ccw(c140.208,93.714) 140.29,90.115 ; 140.126,97.313 cw(c140.208,93.714) 140.208,97.314 cw(c140.208,93.714) 140.29,97.313 ; 140.126,97.313 cw(c140.135,97.786) 139.726,97.549 139.109,98.617 cw(c139.56,98.928) 139.535,99.475 140.885,99.273 cw(c140.856,98.928) 141.155,98.755 140.517,97.649 cw(c140.281,97.786) 140.29,97.513 ; 140.126,97.513 cw(c140.208,93.714) 140.208,97.514 cw(c140.208,93.714) 140.29,97.513 ; 140.126,90.315 ccw(c140.208,93.714) 140.208,90.314 ccw(c140.208,93.714) 140.29,90.315 ; 140.126,97.113 cw(c140.135,97.786) 139.552,97.449 138.914,98.555 cw(c139.56,98.928) 139.516,99.672 140.881,99.475 cw(c140.856,98.928) 141.307,98.617 140.69,97.549 cw(c140.281,97.786) 140.29,97.313 ; 140.126,97.113 cw(c140.208,93.714) 140.208,97.114 cw(c140.208,93.714) 140.29,97.113 ; 140.13,90.715 ccw(c140.135,89.642) 139.206,90.179 138.568,89.073 ccw(c139.56,88.5) 139.493,87.356 140.966,87.159 ccw(c140.856,88.5) 142.021,89.173 141.357,90.323 ccw(c140.281,89.642) 140.308,90.916 cw(c140.208,93.714) 140.208,90.914 ccw(c140.135,89.642) 139.059,90.323 138.395,89.173 ccw(c139.56,88.5) 139.45,87.159 141.015,86.963 ccw(c140.856,88.5) 142.194,89.273 141.533,90.42 ccw(c140.281,89.642) 140.301,91.116 cw(c140.208,93.714) 140.208,91.114 ; 140.13,90.715 ccw(c140.208,93.714) 140.179,90.714 ; 140.13,90.715 cw(c140.135,89.642) 140.179,90.714 ; 140.13,96.713 cw(c140.208,93.714) 140.179,96.714 ; 140.13,96.713 ccw(c140.135,97.786) 140.179,96.714 ; 140.179,90.714 ccw(c140.208,93.714) 140.208,90.714 ccw(c140.208,93.714) 140.237,90.714 ; 140.179,96.714 cw(c140.208,93.714) 140.208,96.714 cw(c140.208,93.714) 140.237,96.714 ; 140.208,91.514 cw(c140.281,89.642) 141.884,90.611 142.121,90.201 142.541,89.473 cw(c140.856,88.5) 141.088,86.568 ; 140.208,95.914 cw(c140.135,97.786) 138.532,96.817 138.295,97.227 137.875,97.955 cw(c139.56,98.928) 139.328,100.86 141.061,100.662 cw(c140.856,98.928) 142.368,98.055 141.708,96.912 cw(c140.281,97.786) 140.208,96.114 cw(c140.135,97.786) 138.708,96.912 138.048,98.055 cw(c139.56,98.928) 139.355,100.662 141.015,100.466 cw(c140.856,98.928) 142.194,98.155 141.533,97.008 cw(c140.281,97.786) 140.301,96.312 ; 140.208,96.314 ccw(c140.208,93.714) 140.115,96.312 cw(c140.135,97.786) 138.883,97.008 138.222,98.155 cw(c139.56,98.928) 139.401,100.466 140.966,100.269 cw(c140.856,98.928) 142.021,98.255 141.357,97.105 cw(c140.281,97.786) 140.208,96.514 ccw(c140.208,93.714) 140.108,96.512 cw(c140.135,97.786) 139.059,97.105 138.395,98.255 cw(c139.56,98.928) 139.45,100.269 140.923,100.072 cw(c140.856,98.928) 141.848,98.355 141.21,97.249 cw(c140.281,97.786) 140.286,96.713 ; 140.208,96.314 ccw(c140.281,97.786) 140.301,96.312 ; 140.208,96.314 cw(c140.208,93.714) 140.301,96.312 ; 140.237,90.714 ccw(c140.208,93.714) 140.286,90.715 ; 140.237,90.714 cw(c140.281,89.642) 140.286,90.715 ; 140.237,96.714 ccw(c140.281,97.786) 140.286,96.713 ; 140.237,96.714 cw(c140.208,93.714) 140.286,96.713 ; 142.113,92.614 cw(c143.771,91.741) 143.733,93.614 145.047,93.614 cw(c145.047,91.668) 146.836,90.903 145.798,89.501 cw(c144.399,90.546) 142.887,89.673 142.228,90.816 cw(c143.698,91.615) 142.286,92.514 cw(c143.771,91.741) 143.728,93.414 145.047,93.414 cw(c145.047,91.668) 146.651,90.979 145.651,89.639 cw(c144.399,90.546) 143.061,89.773 142.399,90.92 cw(c143.698,91.615) 142.412,92.334 ; 142.412,92.334 cw(c143.698,91.615) 142.46,92.414 ; 142.412,92.334 ccw(c140.208,93.714) 142.46,92.414 ; 142.412,95.094 ccw(c143.698,95.813) 142.46,95.014 ; 142.412,95.094 cw(c140.208,93.714) 142.46,95.014 ; 142.46,92.414 ccw(c140.208,93.714) 142.505,92.495 cw(c143.771,91.741) 143.723,93.214 145.047,93.214 cw(c145.047,91.668) 146.458,91.037 145.506,89.78 cw(c144.399,90.546) 143.234,89.873 142.57,91.023 cw(c143.698,91.615) 142.633,92.314 ccw(c140.208,93.714) 142.681,92.402 cw(c143.771,91.741) 143.719,93.014 145.047,93.014 cw(c145.047,91.668) 146.264,91.093 145.356,89.916 cw(c144.399,90.546) 143.407,89.973 142.769,91.079 cw(c143.698,91.615) 142.766,92.147 ; 142.46,95.014 cw(c140.208,93.714) 142.505,94.933 ccw(c143.771,95.687) 143.723,94.214 145.047,94.214 ccw(c145.047,95.76) 146.458,96.391 145.506,97.648 ccw(c144.399,96.882) 143.234,97.555 142.57,96.405 ccw(c143.698,95.813) 142.633,95.114 cw(c140.208,93.714) 142.681,95.026 ccw(c143.771,95.687) 143.719,94.414 145.047,94.414 ccw(c145.047,95.76) 146.264,96.335 145.356,97.512 ccw(c144.399,96.882) 143.407,97.455 142.769,96.349 ccw(c143.698,95.813) 142.766,95.281 ; 142.766,92.147 cw(c143.698,91.615) 142.791,92.189 ; 142.766,92.147 ccw(c140.208,93.714) 142.791,92.189 ; 142.766,95.281 cw(c140.208,93.714) 142.791,95.239 ; 142.766,95.281 ccw(c143.698,95.813) 142.791,95.239 ; 142.791,92.189 ccw(c140.208,93.714) 142.806,92.214 ccw(c140.208,93.714) 142.82,92.239 ; 142.791,95.239 cw(c140.208,93.714) 142.806,95.214 cw(c140.208,93.714) 142.82,95.189 ; 142.82,92.239 ccw(c140.208,93.714) 142.844,92.282 ; 142.82,92.239 cw(c143.771,91.741) 142.844,92.282 ; 142.82,95.189 cw(c140.208,93.714) 142.844,95.146 ; 142.82,95.189 ccw(c143.771,95.687) 142.844,95.146 ; 143.111,91.944 ccw(c140.208,93.714) 143.152,92.014 ccw(c140.208,93.714) 143.192,92.085 ; 143.111,95.484 cw(c140.208,93.714) 143.152,95.414 cw(c140.208,93.714) 143.192,95.343 ; 143.192,92.085 cw(c143.771,91.741) 143.771,92.414 145.047,92.414 cw(c145.047,91.668) 145.714,91.335 144.861,90.251 cw(c144.399,90.546) 143.905,90.311 143.288,91.379 cw(c143.698,91.615) 143.284,91.843 ; 143.192,95.343 ccw(c143.771,95.687) 143.771,95.014 145.047,95.014 ccw(c145.047,95.76) 145.714,96.094 144.861,97.177 ccw(c144.399,96.882) 143.905,97.117 143.288,96.049 ccw(c143.698,95.813) 143.284,95.585 ; 143.284,91.843 ccw(c140.208,93.714) 143.326,91.914 ccw(c140.208,93.714) 143.366,91.986 ; 143.284,95.585 cw(c140.208,93.714) 143.326,95.514 cw(c140.208,93.714) 143.366,95.442 ; 143.366,91.986 cw(c143.771,91.741) 143.771,92.214 145.004,92.214 cw(c145.047,91.668) 145.534,91.416 144.683,90.349 cw(c144.399,90.546) 144.1,90.373 143.462,91.479 cw(c143.698,91.615) 143.457,91.744 ; 143.366,95.442 ccw(c143.771,95.687) 143.771,95.214 145.004,95.214 ccw(c145.047,95.76) 145.534,96.012 144.683,97.079 ccw(c144.399,96.882) 144.1,97.055 143.462,95.949 ccw(c143.698,95.813) 143.457,95.685 ; 143.457,91.744 ccw(c140.208,93.714) 143.499,91.814 ccw(c140.208,93.714) 143.539,91.885 ; 143.457,95.685 cw(c140.208,93.714) 143.499,95.614 cw(c140.208,93.714) 143.539,95.543 ; 143.539,91.885 cw(c143.771,91.741) 143.771,92.014 145.047,92.014 cw(c145.047,91.668) 145.36,91.521 144.522,90.467 144.514,90.456 cw(c144.399,90.546) 144.273,90.473 143.635,91.579 cw(c143.698,91.615) 143.635,91.652 ; 143.539,95.543 ccw(c143.771,95.687) 143.771,95.414 145.047,95.414 ccw(c145.047,95.76) 145.36,95.907 144.522,96.961 144.514,96.972 ccw(c144.399,96.882) 144.273,96.955 143.635,95.849 ccw(c143.698,95.813) 143.635,95.776 ; 143.635,91.652 143.672,91.714 143.707,91.777 ; 143.635,95.776 143.672,95.714 143.707,95.652
  Mid-Layer 1 w0.3: 138.805,92.904 ccw(c140.208,93.714) 141.611,94.524